# Altium PCB печатная-плата_2024-07-24.pcbdoc
Units mm, origin at the board's own origin, x right, y up, seen from the top; angles counter-clockwise.
Board outline 74.93 x 69.91 mm, 2 copper layers (Top Layer, Bottom Layer); 16 components, 48 nets, 92 pads, 20 vias.
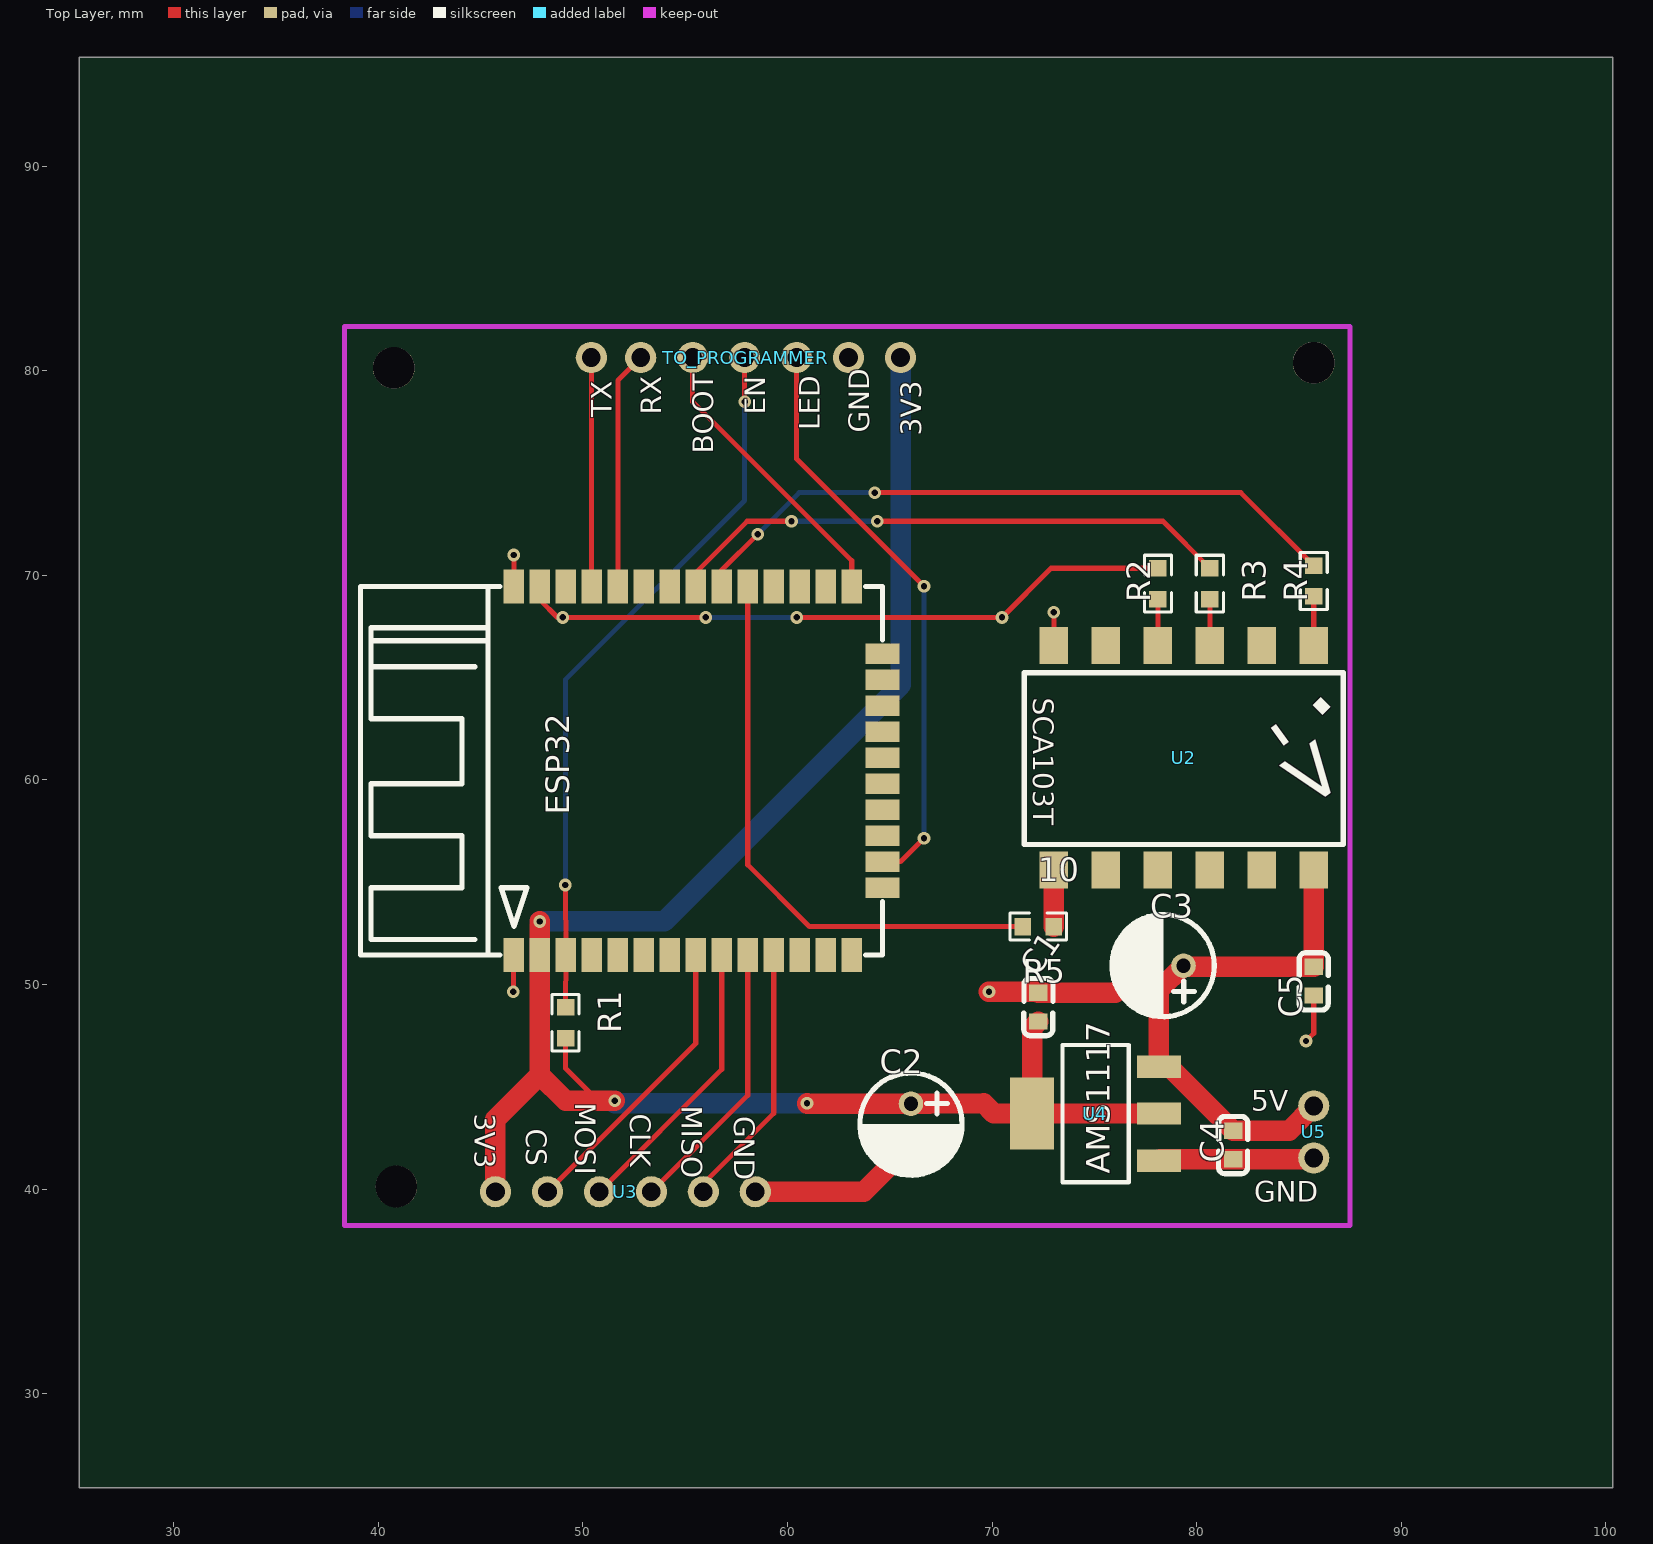
[diagram p0: Top Layer view]
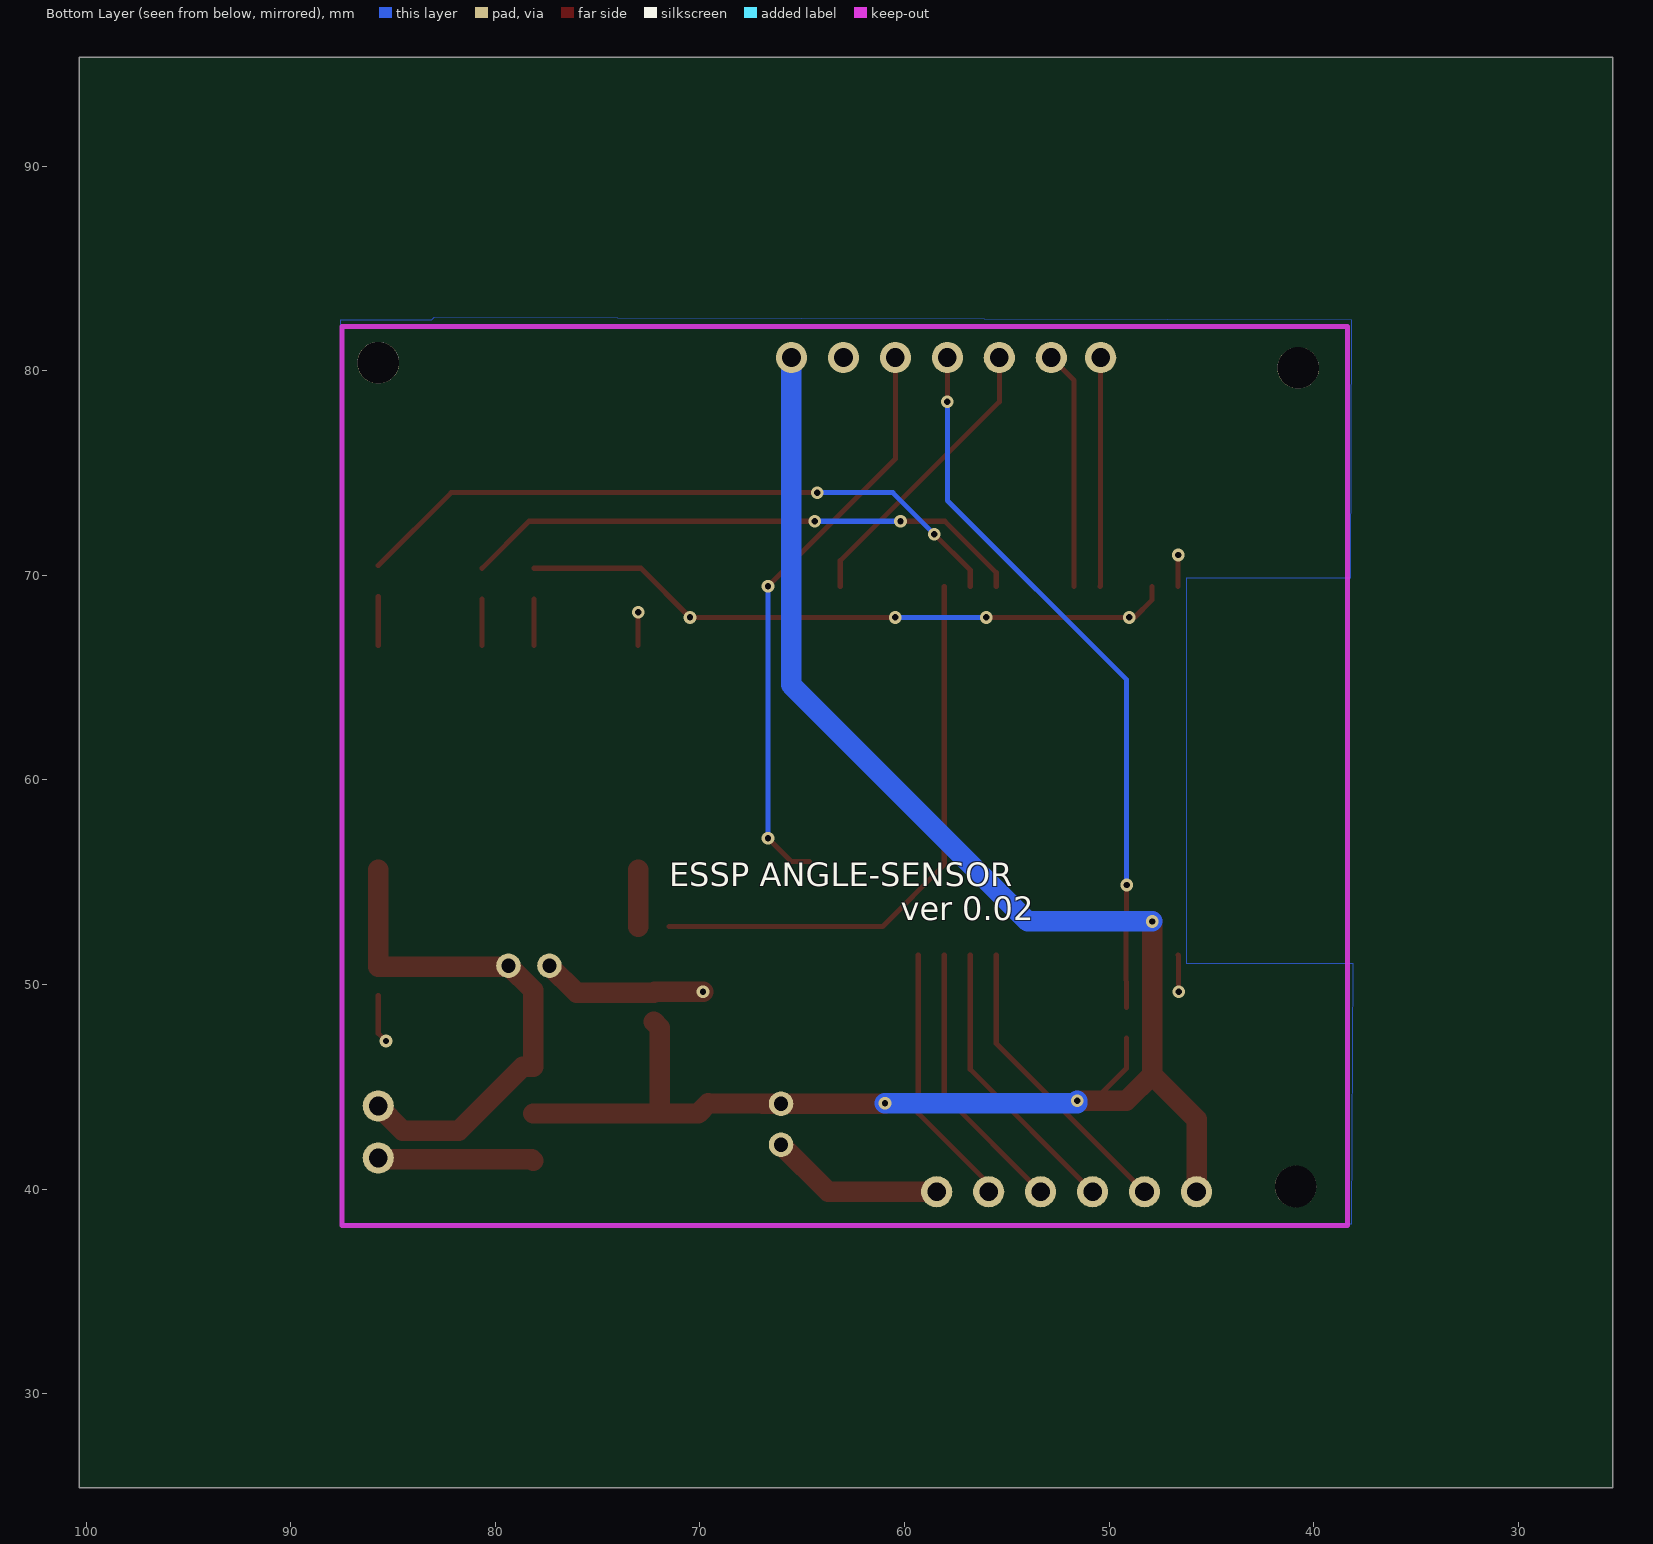
[diagram p1: Bottom Layer view, seen from below]

## Layer stack, top to bottom
Top Layer: signal copper (thickness not stored)
Dielectric: dielectric 0.32, FR-4, Dk 4.8
Bottom Layer: signal copper (thickness not stored)

## Board outline
100.329,25.4 25.4,25.4 25.4,95.313 100.329,95.313

## Components (designator, comment, footprint, x,y, rotation, side; value= is the part's Value field where it differs from the comment)
C1 "10mF" C0603 72.263,48.895 r270 top
C2 "100mF" CAP-5*7 66.04,43.18 r270 top
C3 "100mF" CAP-5*7 78.359,50.927 r180 top
C4 "10mF" C0603 81.788,42.164 r90 top
C5 "100nF" C0603 85.725,50.165 r90 top
ESP32 "ESP-32S" BULETM-SMD_ESP-32S 55.639,60.452 r0 top
R1 "10k" R0603 49.161,48.133 r90 top
R2 "10" R0603 78.105,69.596 r270 top
R3 "10" R0603 80.645,69.596 r270 top
R4 "10" R0603 85.725,69.723 r270 top
R5 "10" R0603 72.263,52.832 r0 top
TO_PROGRAMMER "ESP32 PROGRAMMER" "ESP32 PROGRAMMER" 57.912,80.645 r90 top
U2 "SCA103T" SCA103T 85.725,66.569 r270 top
U3 "SD-READER" SD-READER 58.432,39.878 r270 top
U4 "AMS1117-3.3 SOT223" AMS1117-3.3 75.057,43.688 r0 top
U5 "DC5V CONNECTOR" "DC5V CONNECTOR" 85.725,44.069 r0 top

## Footprints (in the part's own frame and the unit in brackets; to place one, negate y for a bottom-side part, rotate by r counter-clockwise, add the part's x,y. Pads: shape width x height; smd on the part's side, far side on the other; paste and mask are expansions set on the pad)
AMS1117-3.3 [mil]
  rect 85x43 smd paste+0 mask+4: 1(122,-90.5) 2(122,0.5) 3(122,90.5)
  rect 85x138 smd paste+0 mask+4: 4(-122,0.5)
  silkscreen extent -64,-132 64,132
BULETM-SMD_ESP-32S [mm]
  rect 1x1.65 smd paste-100 mask+0.051: 1(-9.005,-9) 2(-7.735,-9) 3(-6.465,-9) 4(-5.195,-9) 5(-3.925,-9) 6(-2.655,-9) 7(-1.385,-9) 8(-0.115,-9) 9(1.155,-9) 10(2.425,-9) 11(3.695,-9) 12(4.965,-9) 13(6.235,-9) 14(7.505,-9) 25(7.505,9) 26(6.235,9) 27(4.965,9) 28(3.695,9) 29(2.425,9) 30(1.155,9) 31(-0.115,9) 32(-1.385,9) 33(-2.655,9) 34(-3.925,9) 35(-5.195,9) 36(-6.465,9) 37(-7.735,9) 38(-9.005,9)
  rect 1.65x1 smd paste-100 mask+0.051: 15(9.005,-5.715) 16(9.005,-4.445) 17(9.005,-3.175) 18(9.005,-1.905) 19(9.005,-0.635) 20(9.005,0.635) 21(9.005,1.905) 22(9.005,3.175) 23(9.005,4.445) 24(9.005,5.715)
  silkscreen extent -16.5,-9 9,9
C0603 [mm]
  rect 0.8x0.9 smd paste+0 mask+0.051: 1(-0.7,0) 2(0.7,0)
  silkscreen extent -1.41,-0.71 1.39,0.72
CAP-5*7 [mm]
  round 1.2 hole 0.7 paste+0 mask+0.051: 1(-1.001,0) 2(1.001,0)
  silkscreen extent -2.5,-2.54 2.54,2.54
"DC5V CONNECTOR" [mil]
  round 60 hole 36 paste+0 mask+2: 1(0,0) 2(0,-100)
"ESP32 PROGRAMMER" [mil]
  round 60 hole 36 paste+0 mask+2: 1(0,295) 2(0,200) 3(0,100) 4(0,0) 5(0,-100) 6(0,-200) 7(0,-300)
R0603 [mm]
  rect 0.806x0.864 smd paste-100 mask+0.051: 1(-0.753,0) 2(0.753,0)
  silkscreen extent -1.39,-0.66 1.39,0.66
SCA103T [mm]
  rect 1.81x1.39 smd paste+0 mask+0.051: 1(0,0) 2(0,-2.54) 3(0,-5.08) 4(0,-7.62) 5(0,-10.16) 6(0,-12.7) 7(10.96,-12.7) 8(10.96,-10.16) 9(10.96,-7.62) 10(10.96,-5.08) 11(10.96,-2.54) 12(10.96,0)
  silkscreen extent 1.33,-14.14 9.72,1.45
SD-READER [mil]
  round 60 hole 36 paste+0 mask+2: 1(0,0) 2(0,-100) 3(0,-200) 4(0,-300) 5(0,-400) 6(0,-500)

## Free pads (board coordinates)
  round 2.032 hole 2.032 unplated paste+0: ""(40.767,80.137) ""(40.894,40.132) ""(85.725,80.391)

## Via types
v1: diameter 0.62, hole 0.31, Top Layer to Bottom Layer, tented both sides, 20 vias

## Nets (pads, with @x,y where several pads share a name; then routed paths per layer and width w, separated by ;. In a path a pad name is that pad's centre, name@x,y a point inside that pad or via, vN(x,y) a via of type N, cw(c..) or ccw(c..) an arc to the next point about the centre after c; other vN are vias at no path point)
GND: C1.1 C2.2 C3.2 C4.1 C5.1 ESP32.1 ESP32.38 TO_PROGRAMMER.6 U2.6 U3.1 U4.1 U5.2 | length 31.6
  Top Layer w0.25: ESP32.38 v1(46.634,70.993) ; U2.6 v1(73.025,68.199) ; v1(85.344,47.244) 85.725,47.625 C5.1
  Top Layer w0.254: v1(46.609,49.657) 46.609,51.428 ESP32.1
  Top Layer w1: U3.1 63.739,39.878 C2.2 ; v1(69.85,49.657) 72.201,49.657 C1.1 76.026,49.595 C3.2 ; U4.1 78.231,41.464 C4.1 85.66,41.464 U5.2
R1_2: ESP32.3 R1.2 TO_PROGRAMMER.4 | length 35.4
  Top Layer w0.25: v1(49.149,54.864) ESP32.3 R1.2 ; v1(57.912,78.486) TO_PROGRAMMER.4
  Bottom Layer w0.25: v1(49.149,54.864) 49.148,64.897 57.911,73.66 v1(57.912,78.486)
U1_4: ESP32.4
U1_5: ESP32.5
U1_6: ESP32.6
U1_7: ESP32.7
U1_8: ESP32.8 U3.5 | length 14.6
  Top Layer w0.254: U3.5 55.523,47.129 ESP32.8
U1_9: ESP32.9 U3.4 | length 14.1
  Top Layer w0.254: U3.4 56.793,45.859 ESP32.9
U1_10: ESP32.10 U3.3 | length 13.5
  Top Layer w0.254: U3.3 58.063,44.589 ESP32.10
U1_11: ESP32.11 U3.2 | length 13
  Top Layer w0.254: U3.2 55.892,40.272 59.334,43.711 ESP32.11
U1_12: ESP32.12
U1_13: ESP32.13
U1_14: ESP32.14
U1_15: ESP32.15
U1_16: ESP32.16 TO_PROGRAMMER.5 | length 28.6
  Top Layer w0.25: TO_PROGRAMMER.5 60.452,75.692 v1(66.675,69.469) ; ESP32.16 65.531,56.007 v1(66.675,57.151)
  Bottom Layer w0.25: v1(66.675,57.151) v1(66.675,69.469)
U1_17: ESP32.17
U1_18: ESP32.18
U1_19: ESP32.19
U1_20: ESP32.20
U1_21: ESP32.21
U1_22: ESP32.22
U1_23: ESP32.23
U1_24: ESP32.24
U1_25: ESP32.25 TO_PROGRAMMER.3 | length 14.4
  Top Layer w0.25: TO_PROGRAMMER.3 55.371,78.486 63.144,70.714 ESP32.25
U1_26: ESP32.26
U1_27: ESP32.27
U1_28: ESP32.28
U1_29: ESP32.29 R5.1 | length 28.3
  Top Layer w0.25: ESP32.29 58.064,67.668 58.064,55.855 61.086,52.832 R5.1@71.511,52.832
U1_30: ESP32.30 R4.1 | length 32.8
  Top Layer w0.25: ESP32.30 56.794,70.256 v1(58.547,72.009) ; v1(64.262,74.041) 82.16,74.041 R4.1
  Bottom Layer w0.25: v1(58.547,72.009) 60.579,74.041 v1(64.262,74.041)
U1_31: ESP32.31 R3.1 | length 27.8
  Top Layer w0.25: ESP32.31 55.524,70.129 58.038,72.644 v1(60.198,72.644) ; v1(64.389,72.644) 78.35,72.644 R3.1
  Bottom Layer w0.25: v1(60.198,72.644) v1(64.389,72.644)
U1_32: ESP32.32
U1_33: ESP32.33
U1_34: ESP32.34 TO_PROGRAMMER.2 | length 11.7
  Top Layer w0.25: ESP32.34@51.713,69.452 51.713,79.526 TO_PROGRAMMER.2
U1_35: ESP32.35 TO_PROGRAMMER.1 | length 11.2
  Top Layer w0.25: TO_PROGRAMMER.1 50.419,69.476 ESP32.35
U1_36: ESP32.36
U1_37: ESP32.37 R2.1 | length 32.2
  Top Layer w0.25: ESP32.37 47.904,68.809 48.767,67.945 v1(49.022,67.945) v1(56.007,67.945) ; v1(60.452,67.945) v1(70.485,67.945) 72.889,70.349 R2.1
  Bottom Layer w0.25: v1(56.007,67.945) v1(60.452,67.945)
U2_1: R4.2 U2.1 | length 2.4
  Top Layer w0.25: U2.1 R4.2
U2_2: U2.2
U2_3: R3.2 U2.3 | length 2.3
  Top Layer w0.25: U2.3 R3.2
U2_4: R2.2 U2.4 | length 2.3
  Top Layer w0.25: U2.4 R2.2
U2_5: U2.5
U2_7: R5.2 U2.7 | length 2.8
  Top Layer w1: R5.2 73.016,55.6 U2.7
U2_8: U2.8
U2_9: U2.9
U2_10: U2.10
U2_11: U2.11
U4_3: C3.1 C4.2 C5.2 U2.12 U4.3 U5.1 | length 25.9
  Top Layer w1: U5.1 84.52,42.864 C4.2 78.665,45.987 U4.3 78.156,49.723 C3.1 79.422,50.865 C5.2 U2.12
U4_4: C1.2 C2.1 ESP32.2 R1.1 TO_PROGRAMMER.7 U3.6 U4.2 U4.4 | length 92.9
  Top Layer w0.25: R1.1 49.161,45.913 50.751,44.323
  Top Layer w1: U3.6 45.732,43.409 47.904,45.58 ; v1(47.904,53.086) ESP32.2 47.904,45.58 ; v1(51.562,44.323) 49.161,44.323 47.904,45.58 ; v1(60.96,44.196) 60.975,44.181 C2.1 ; 66.928,44.181 C2.1 ; C1.2 71.958,47.89 U4.4 ; U4.2 U4.4 ; C2.1 69.595,44.196 70.091,43.701 U4.4
  Bottom Layer w1: v1(47.904,53.086) 53.975,53.086 65.532,64.643 TO_PROGRAMMER.7 ; v1(51.562,44.323) 51.562,44.196 v1(60.96,44.196)

## Polygon pours and split planes (outlines as drawn)
GND on Bottom Layer (solid): 38.163,82.486 38.227,69.85 46.228,69.85 46.228,51.054 38.1,51.054 38.163,38.291 87.566,38.291 87.566,82.486 83.121,82.486 82.995,82.614

## Silkscreen, mask and mechanical layers (free items; w line width, h text height)
Top Overlay:
  text "RX" at 53.84,77.851 h1 r90
  text "EN" at 58.92,77.851 h1 r90
  text "LED" at 61.587,77.089 h1 r90
  text "GND" at 64,76.962 h1 r90
  text "BOOT" at 56.38,75.946 h1 r90
  text "MOSI" at 49.641,44.217 h1 r270
  text "MISO" at 54.848,44.09 h1 r270
  text "CLK" at 52.32,43.698 h1 r270
  text "CS" at 47.228,42.947 h1 r270
  text "AMS1117" at 75.756,40.767 h1.14 r90
Bottom Overlay:
  text "ESSP ANGLE-SENSOR" at 71.501,54.8 h1.14
  text "ver 0.02" at 60.198,53.149 h1.14
Document:
  lines w0.003: 62.864,60.356 62.865,60.357

## Text inside footprints (layer, text, board x,y; h text height)
TO_PROGRAMMER: Top Overlay "TX" at 51.427,77.724 h1 r90; Top Overlay "3V3" at 66.54,76.835 h1 r90
U2: Top Overlay "->" at 82.734,62.143 h3 r306
U3: Top Overlay "GND" at 57.4,43.571 h1 r270; Top Overlay "3V3" at 44.712,43.688 h1 r270
U5: Top Overlay "5V" at 82.677,43.823 h1; Top Overlay "GND" at 82.804,39.378 h1